# EAGLE board PWM_Driver (EAGLE 7.6.0)
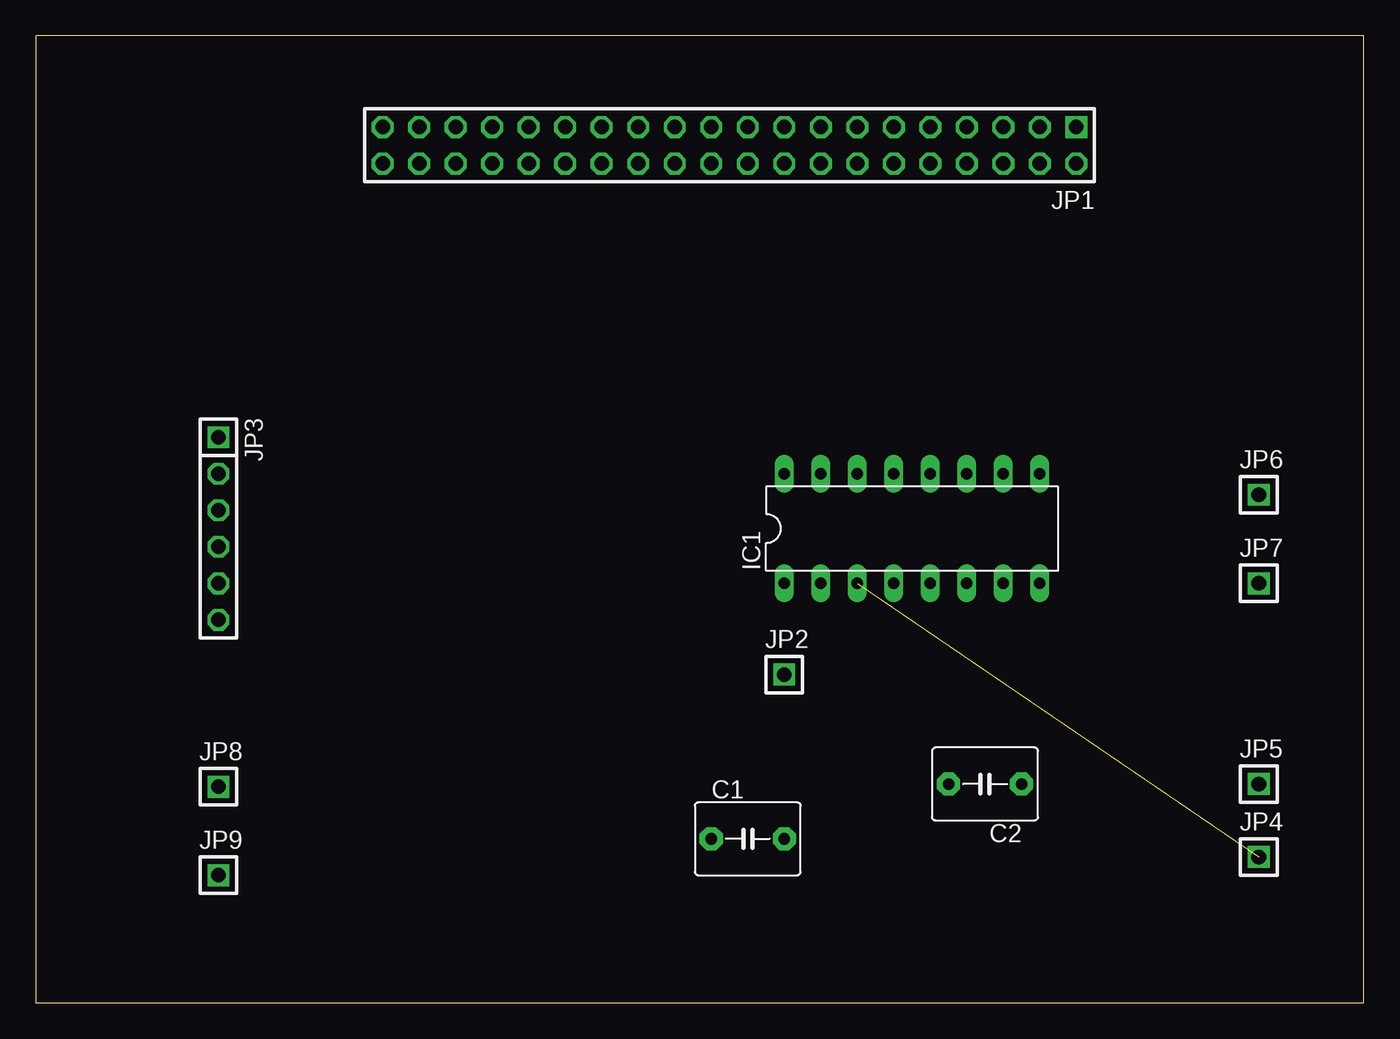
[diagram p0: board, top side]
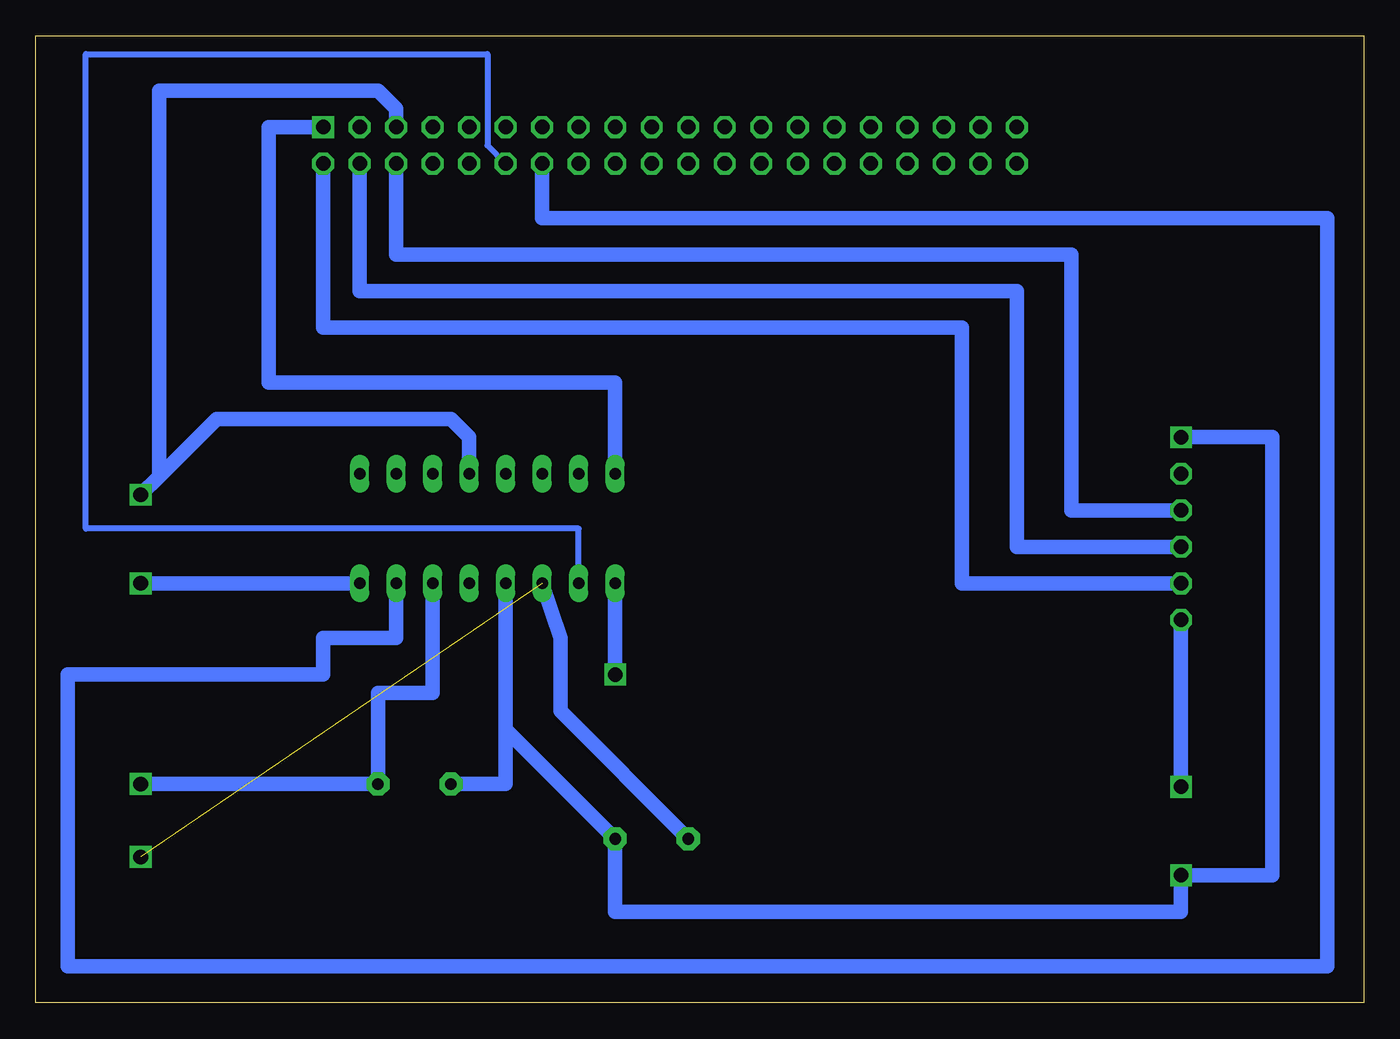
[diagram p1: board, bottom side, seen from below]

Size 92.38 x 67.3 mm. Coordinates in mm from the lower left corner, seen from the top.
Outline: 0,0 92.38,0 92.38,67.3 0,67.3 0,0
Copper layers (1*16): Top 0.035mm / dielectric 1.5mm / Bottom 0.035mm
Design rules "default": minimum track width 10mil, minimum drill 24mil, track to track 8mil, track to pad 8mil, pad to pad 8mil, via to via 8mil, smd to smd 8mil, copper to edge 40mil, drill to drill 8mil, minimum pad ring 10mil, minimum via ring 8mil, stop-mask expansion 4mil, vias tented up to drill 0mil, thermal gap 10mil

## Footprints (pad centres in the part's own frame; a part is rotated, then mirrored left to right if it is on the bottom)
C5B5 = drill 0.813 pad 1.6 octagon: 1 -2.54,0; 2 2.54,0
DIL16 = drill 0.813 long: 1 -8.89,-3.81; 2 -6.35,-3.81; 3 -3.81,-3.81; 4 -1.27,-3.81; 5 1.27,-3.81; 6 3.81,-3.81; 7 6.35,-3.81; 8 8.89,-3.81; 9 8.89,3.81; 10 6.35,3.81; 11 3.81,3.81; 12 1.27,3.81; 13 -1.27,3.81; 14 -3.81,3.81; 15 -6.35,3.81; 16 -8.89,3.81
2X20 = drill 1.016 square: 1 -24.13,-1.27 | drill 1.016 octagon: 2 -24.13,1.27; 3 -21.59,-1.27; 4 -21.59,1.27; 5 -19.05,-1.27; 6 -19.05,1.27; 7 -16.51,-1.27; 8 -16.51,1.27; 9 -13.97,-1.27; 10 -13.97,1.27; 11 -11.43,-1.27; 12 -11.43,1.27; 13 -8.89,-1.27; 14 -8.89,1.27; 15 -6.35,-1.27; 16 -6.35,1.27; 17 -3.81,-1.27; 18 -3.81,1.27; 19 -1.27,-1.27; 20 -1.27,1.27; 21 1.27,-1.27; 22 1.27,1.27; 23 3.81,-1.27; 24 3.81,1.27; 25 6.35,-1.27; 26 6.35,1.27; 27 8.89,-1.27; 28 8.89,1.27; 29 11.43,-1.27; 30 11.43,1.27; 31 13.97,-1.27; 32 13.97,1.27; 33 16.51,-1.27; 34 16.51,1.27; 35 19.05,-1.27; 36 19.05,1.27; 37 21.59,-1.27; 38 21.59,1.27; 39 24.13,-1.27; 40 24.13,1.27
1X01 = drill 1.016 square: 1 0,0
1X06 = drill 1.016 square: 1 -6.35,0 | drill 1.016 octagon: 2 -3.81,0; 3 -1.27,0; 4 1.27,0; 5 3.81,0; 6 6.35,0

## Placement (x,y rotation side)
C1  [C5B5]  49.53,11.43 0 top
C2  [C5B5]  66.04,15.24 180 top
IC1  L293D  [DIL16]  60.96,33.02 0 top
JP1  [2X20]  48.26,59.69 180 top
JP2  [1X01]  52.07,22.86 0 top
JP3  [1X06]  12.7,33.02 270 top
JP4  [1X01]  85.09,10.16 0 top
JP5  [1X01]  85.09,15.24 0 top
JP6  [1X01]  85.09,35.37 0 top
JP7  [1X01]  85.09,29.21 0 top
JP8  [1X01]  12.7,15.05 0 top
JP9  [1X01]  12.7,8.89 0 top

## Library data of the parts
C1 C2 = capacitor-wima
IC1 = st-microelectronics; MPN: L293D; OC_FARNELL: 9589619; OC_NEWARK: 56P8249
JP1-JP9 = pinhead

## Nets
GND2: IC1.5
GND3: IC1.13
N$1: IC1.12 JP1.5 JP6.1
N$2: JP1.2 JP3.5
N$3: JP1.4 JP3.4
N$4: JP1.6 JP3.3
N$5: IC1.1 JP2.1
N$6: C1.1 IC1.3 JP4.1
N$7: C2.1 IC1.6 JP5.1
N$8: C1.2 C2.2 IC1.4 JP3.1 JP9.1
N$9: JP3.6 JP8.1
N$13: IC1.8 JP7.1
N$14: IC1.16 JP1.1
N$15: IC1.2 JP1.12
N$16: IC1.7 JP1.14

## Tracks (layer width: path | path; a pad name or v marks a point on that pad's centre or on a via)
N$1
  Bottom 1.016: JP1.5 67.31,62.23 68.58,63.5 83.82,63.5 83.82,36.64 | 83.82,36.64 JP6.1 | IC1.12 62.23,39.37 63.5,40.64 79.82,40.64 83.82,36.64
N$2
  Bottom 1.016: JP3.5 27.94,29.21 27.94,46.99 72.39,46.99 JP1.2
N$3
  Bottom 1.016: JP3.4 24.13,31.75 24.13,49.53 69.85,49.53 JP1.4
N$4
  Bottom 1.016: JP3.3 20.32,34.29 20.32,52.07 67.31,52.07 JP1.6
N$5
  Bottom 1.016: IC1.1 JP2.1
N$6  (1 unrouted)
  Bottom 1.016: C1.1 55.88,20.32 55.88,25.4 IC1.3
N$7
  Bottom 1.016: JP5.1 C2.1 68.58,21.59 64.77,21.59 IC1.6
N$8
  Bottom 1.016: JP3.1 6.35,39.37 6.35,8.89 JP9.1 12.7,6.35 52.07,6.35 C1.2 59.69,19.05 | IC1.4 59.69,19.05 | C2.2 59.69,15.24 59.69,19.05
N$9
  Bottom 1.016: JP8.1 JP3.6
N$13
  Bottom 1.016: IC1.8 JP7.1
N$14
  Bottom 1.016: JP1.1 76.2,60.96 76.2,43.18 52.07,43.18 IC1.16
N$15
  Bottom 0.406: IC1.2 54.61,33.02 88.9,33.02 88.9,66.04 60.96,66.04 60.96,59.69 JP1.12
N$16
  Bottom 1.016: JP1.14 57.15,54.61 2.54,54.61 2.54,2.54 90.17,2.54 90.17,22.86 72.39,22.86 72.39,25.4 67.31,25.4 IC1.7